# EAGLE board Module_MCU_ESP32Embed (EAGLE 9.6.2)
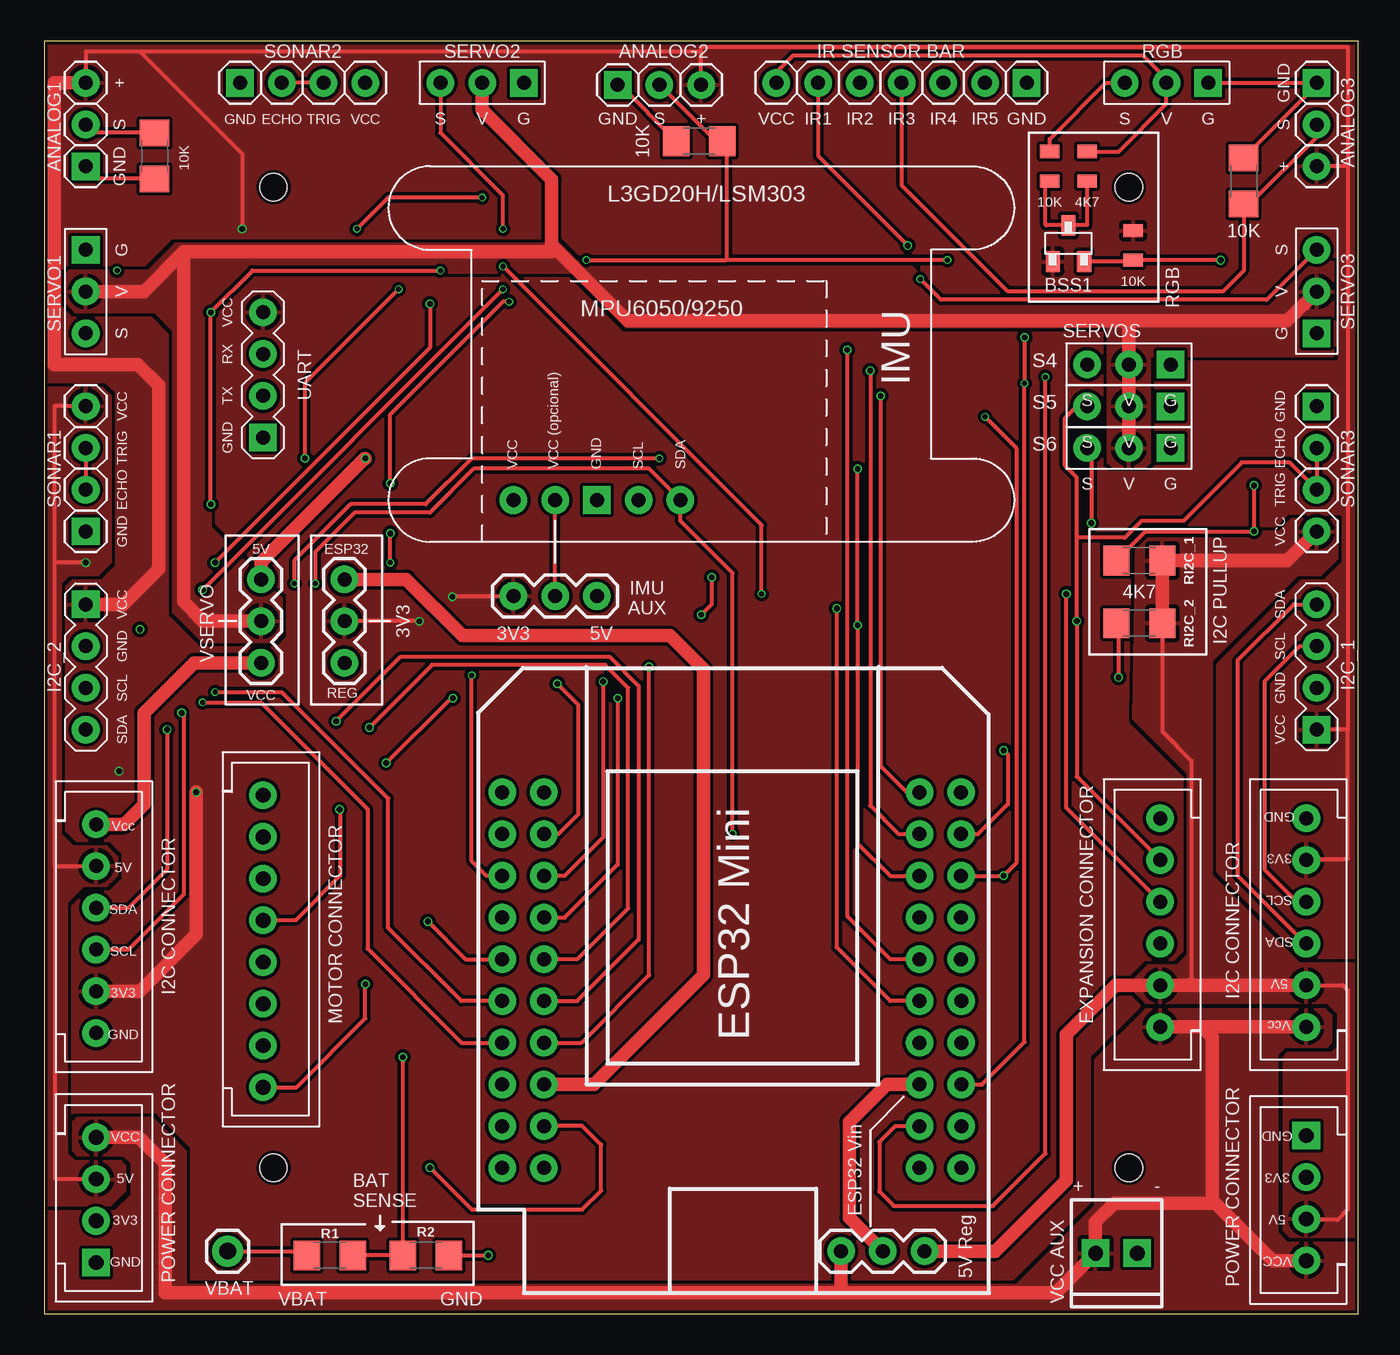
[diagram p0: board, top side]
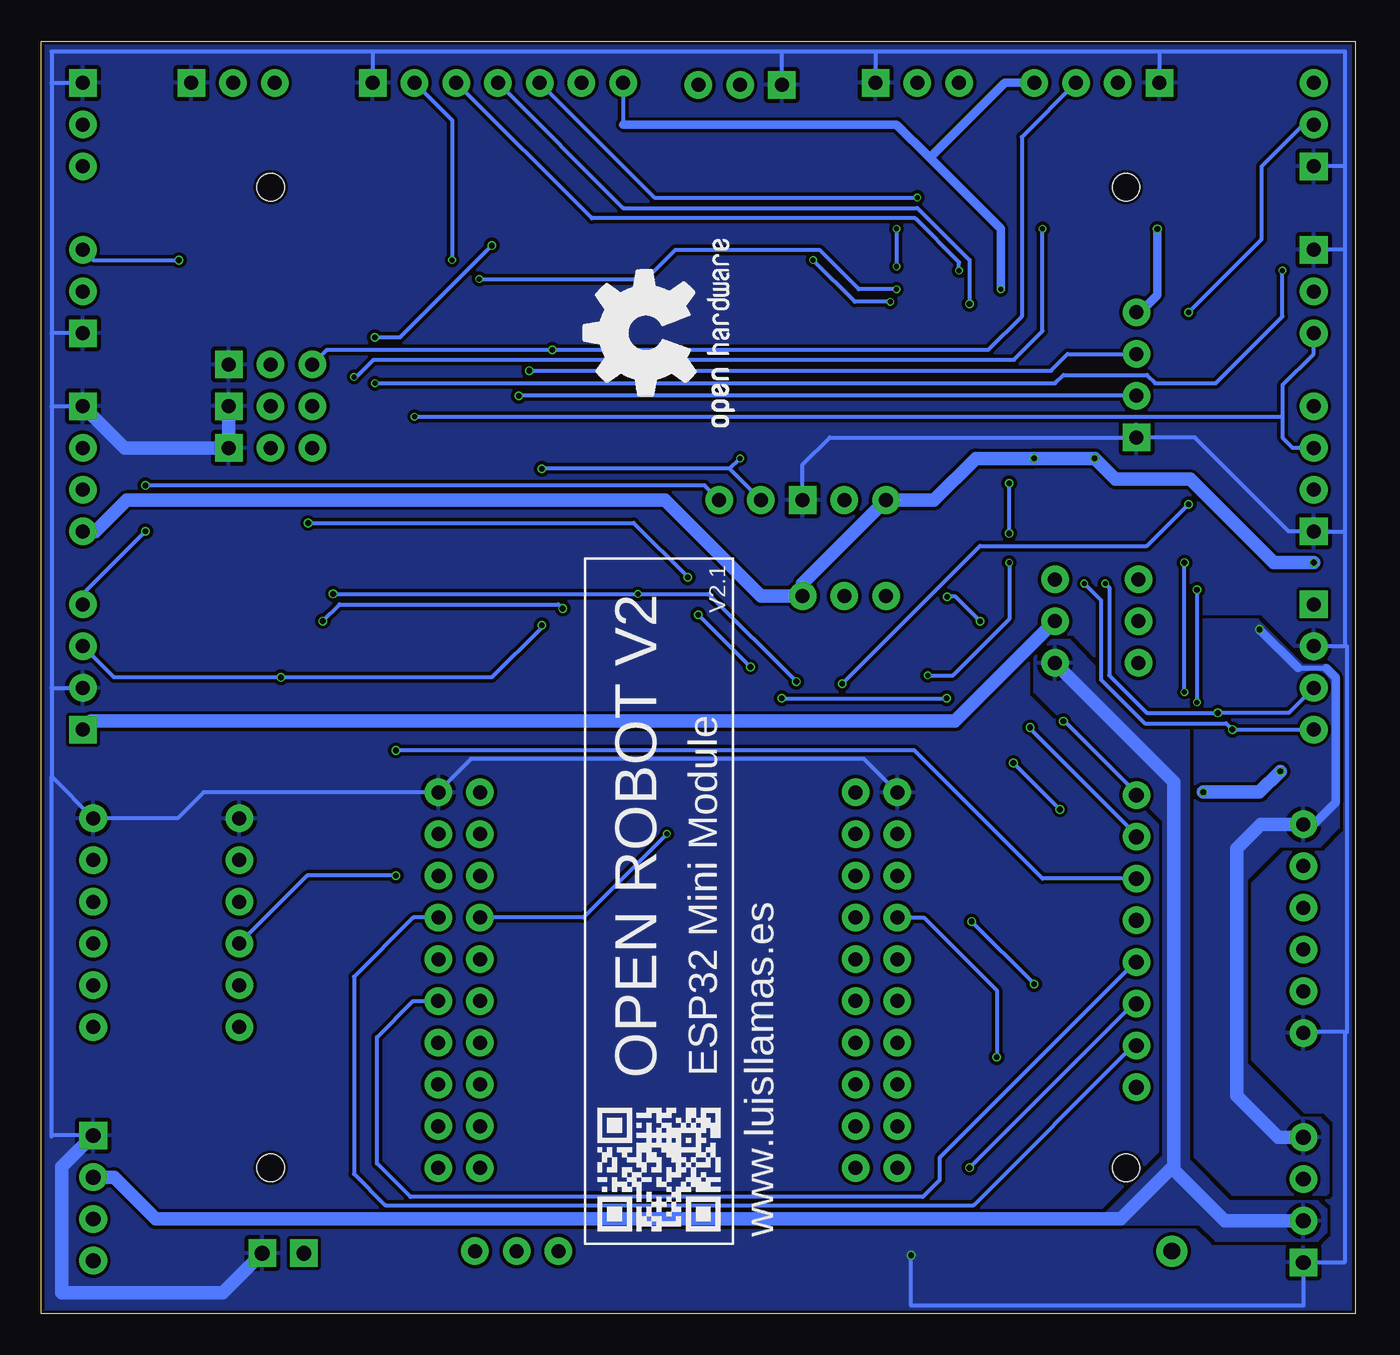
[diagram p1: board, bottom side, seen from below]

Size 80.01 x 77.47 mm. Coordinates in mm from the lower left corner, seen from the top.
Outline: 0,77.47 0,0 80.01,0 80.01,77.47 0,77.47
Copper layers (1*16): Top 0.035559375mm / dielectric 1.6mm / Bottom 0.035559375mm
Design rules "jlcpcb2layer": minimum track width 5mil, minimum drill 12mil, track to track 5mil, track to pad 5mil, pad to pad 5mil, via to via 5mil, smd to smd 5mil, copper to edge 8mil, drill to drill 6mil, minimum pad ring 5mil, minimum via ring 3mil, stop-mask expansion 2.5mil, vias tented up to drill 0mil, thermal gap 10mil
Net classes: 0 default: clearance 0.205 mm
Holes 1.65 mm at 13.97,68.58 13.97,8.89 66.04,68.58 66.04,8.89

## Footprints (pad centres in the part's own frame; a part is rotated, then mirrored left to right if it is on the bottom)
JUMPER_3 = drill 0.85 pad 1.676: 1 0,0; 2 2.54,0; 3 5.08,0
0805 = smd 0.8 x 1.2: 1 -0.9,0; 2 0.9,0
LDR = drill 0.85 pad 1.676 square: GND 0,0 | drill 0.85 pad 1.676: SIG 2.54,0; VCC 5.08,0
1X02_2.54_SCREWTERM = drill 0.9 pad 1.676 square: P1 2.54,0; P2 0,0
1X01 = drill 1.016 pad 1.88: 1 0,0
SOT23 = smd 1.3 x 0.9: 1 -1.1,0.95; 2 -1.1,-0.95; 3 1.1,0
CONNECTOR_AUX = drill 0.85 pad 1.676: 5V 0,-3.754; GND 0,6.406; GPIO1 0,-1.214; GPIO2 0,1.326; GPIO3 0,3.866; VC 0,-6.294
CONNECTOR_I2C = drill 0.85 pad 1.676: 3V3 0,3.866; 5V 0,-3.754; GND 0,6.406; SCL 0,1.326; SDA 0,-1.214; VC 0,-6.294
I2C_VCC_GND_SCL_SDA = drill 0.85 pad 1.676: GND 2.54,0; SCL 5.08,0; SDA 7.62,0 | drill 0.85 pad 1.676 square: VCC 0,0
IR-5 = drill 0.85 pad 1.676: 1 -5.08,0; 2 -2.54,0; 3 0,0; 4 2.54,0; 5 5.08,0; VCC -7.62,0 | drill 0.85 pad 1.676 square: GND 7.62,0
SERVO = drill 0.85 pad 1.676 square: GND -2.54,0 | drill 0.85 pad 1.676: SIG 2.54,0; VCC 0,0
MOTOR-CONNECTOR = drill 0.9 pad 1.676: EN_A1/S1_S 0,-8.834; EN_A2/S1_D 0,-6.294; EN_B1/S2_D 0,-1.214; EN_B2/S3_S 0,1.326; ENC_1/S4_S 0,6.406; ENC_2/S4_D 0,8.946; PWM_A/S2_S 0,-3.754; PWM_B/S3_D 0,3.866
POWER-CONNECTOR = drill 0.9 pad 1.676: 3V3 0,1.326; 5V 0,-1.214; VCC 0,-3.754 | drill 0.9 pad 1.676 square: GND 0,3.866
1206 = smd 1.6 x 1.8: 1 -1.4,0; 2 1.4,0
ULTRASONIC = drill 0.85 pad 1.676: ECHO 1.27,0; TRIG -1.27,0; VCC -3.81,0 | drill 0.85 pad 1.676 square: GND 3.81,0
IMU_6/9/10DOF = drill 0.85 pad 1.676 square: GND -8.89,6.35 | drill 0.85 pad 1.676: SCL -8.89,3.81; SDA -8.89,1.27; VCC -8.89,11.43; VCC_AUX -8.89,8.89
ESP32-WEMOS = drill 0.85 pad 1.676: 3V3 -15.294,11.42; CLK/IO6 10.111,6.34; CMD/IO11 -17.834,6.34; GND@1 -17.834,29.2; GND@2 7.571,13.96; GND@3 10.106,29.2; IO0 10.111,13.96; IO2 10.111,11.42; IO4 10.111,16.5; IO5 -15.294,13.96; IO16 7.571,16.5; IO17 7.571,19.04; IO18 -15.294,21.58; IO19 -15.294,19.04; IO21 7.571,21.58; IO22 7.571,24.12; IO23 -15.294,16.5; IO25 10.106,24.12; IO26 -15.294,24.12; IO27 10.106,26.66; IO32 10.106,21.58; IO33 -17.834,19.04; IO34 -17.834,16.5; IO35 -17.834,21.58; NC@1 -17.834,26.66; NC@2 -17.834,11.42; RST/EN -15.294,29.2; RXD/IO3 7.571,26.66; SD0/IO7 7.571,6.34; SD1/IO8 10.111,8.88; SD2/IO9 -17.834,8.88; SD3/IO10 -15.294,6.34; SVN/IO39 -17.834,24.12; SVP/IO36 -15.294,26.66; TCK/IO13 -15.294,8.88; TD0/IO15 7.571,8.88; TDI/IO12 10.106,19.04; TMS/IO14 -17.834,13.96; TXD/IO1 7.571,29.2; VCC 7.571,11.42
GENERIC_UART = drill 0.85 pad 1.676 square: GND 0,0 | drill 0.85 pad 1.676: RX 5.08,0; TX 2.54,0; VCC 7.62,0

## Placement (x,y rotation side)
3V3_SELECTOR  JUMPER_3  [JUMPER_3]  18.29,44.7 270 top
4K1  470  [0805]  61.21,69.85 270 top
10K1  10K  [0805]  66.29,65.02 90 top
ANALOG1  [LDR]  2.54,69.85 90 top
ANALOG2  [LDR]  34.92,74.8 0 top
ANALOG3  [LDR]  77.47,74.93 270 top
AUX_POWER  [1X02_2.54_SCREWTERM]  66.55,3.68 180 top
BAT_SENSE  [1X01]  11.18,3.81 0 top
BSS1  [SOT23]  62.36,65.15 90 top
CON_AUX  CONNECTOR_AUX  [CONNECTOR_AUX]  67.94,23.75 0 top
CON_I2C_1  CONNECTOR_I2C  [CONNECTOR_I2C]  76.83,23.75 0 top
CON_I2C_2  CONNECTOR_I2C  [CONNECTOR_I2C]  3.17,23.5 180 top
GOLD_ORB_SM1  OSHWLOGO_GOLD_ORB_MED  [OSHW1]  36.07,53.34 90 bottom
I2C_1  I2C  [I2C_VCC_GND_SCL_SDA]  77.47,35.56 90 top
I2C_2  GENERIC_I2CVCC_GND_SCL_SDA  [I2C_VCC_GND_SCL_SDA]  2.54,43.18 270 top
IMU_AUX  JUMPER_3  [JUMPER_3]  28.57,43.69 0 top
IR_SENSOR  [IR-5]  52.2,74.93 0 top
JP1  [SERVO]  68.33,74.93 180 top
MOTOR_CONNECTOR  MOTOR-CONNECTOR  [MOTOR-CONNECTOR]  13.34,22.73 180 top
POWER_CONNECTOR_1  POWER-CONNECTOR  [POWER-CONNECTOR]  3.17,6.99 180 top
POWER_CONNECTOR_2  POWER-CONNECTOR  [POWER-CONNECTOR]  76.83,6.99 0 top
R1  [1206]  17.4,3.56 180 top
R2  [1206]  23.24,3.56 0 top
R3  10K  [0805]  63.5,69.85 90 top
R_LDR_1  10k  [1206]  6.73,70.48 90 top
R_LDR_2  10k  [1206]  39.88,71.37 0 top
R_LDR_3  10k  [1206]  73.03,68.96 270 top
RI2C_1  4k7  [1206]  66.67,45.85 0 top
RI2C_2  4k7  [1206]  66.67,42.04 0 top
S4  [SERVO]  66.04,57.78 180 top
S5  [SERVO]  66.04,55.24 180 top
S6  [SERVO]  66.04,52.7 180 top
SERVO1  [SERVO]  2.54,62.23 270 top
SERVO2  [SERVO]  26.67,74.93 180 top
SERVO3  [SERVO]  77.47,62.23 90 top
SONAR1  [ULTRASONIC]  2.54,51.44 270 top
SONAR2  [ULTRASONIC]  15.75,74.93 180 top
SONAR3  [ULTRASONIC]  77.47,51.44 90 top
U1  IMU_6/9/10DOFMPU6050  [IMU_6/9/10DOF]  40.01,58.42 90 top
U$5  ESP32-WEMOS  [ESP32-WEMOS]  45.72,2.54 0 top
UART  UART  [GENERIC_UART]  13.34,53.34 90 top
VIN_SELECTOR  JUMPER_3  [JUMPER_3]  53.59,3.81 180 top
VSERVO_SELECTOR  JUMPER_3  [JUMPER_3]  13.21,44.7 270 top

## Library data of the parts
3V3_SELECTOR IMU_AUX VIN_SELECTOR VSERVO_SELECTOR = LLL_Jumpers
4K1 10K1 R1-R3 R_LDR_1-R_LDR_3 RI2C_1 RI2C_2 = SparkFun-Resistors
ANALOG1-ANALOG3 I2C_1 I2C_2 IR_SENSOR JP1 S4-S6 SERVO1-SERVO3 SONAR1-SONAR3 UART = LLL_Headers
AUX_POWER CON_AUX CON_I2C_1 CON_I2C_2 = LLL_Connectors
BAT_SENSE = SparkFun-Connectors
BSS1 = we-transistor
GOLD_ORB_SM1 = LLL_Frames
MOTOR_CONNECTOR = LLL_Motors
POWER_CONNECTOR_1 POWER_CONNECTOR_2 = LLL_Power
U1 = LLL_IMUs
U$5 = LLL_ESP32

## Nets
3V3: 3V3_SELECTOR.2 10K1.2 ANALOG1.VCC ANALOG2.VCC ANALOG3.VCC BSS1.1 CON_I2C_1.3V3 CON_I2C_2.3V3 I2C_1.VCC I2C_2.VCC IMU_AUX.1 UART.VCC
3V3_ARD: 3V3_SELECTOR.1 U$5.3V3
3V3_REG: 3V3_SELECTOR.3 POWER_CONNECTOR_1.3V3 POWER_CONNECTOR_2.3V3
5V_REG: CON_AUX.5V CON_I2C_1.5V CON_I2C_2.5V IMU_AUX.3 IR_SENSOR.VCC JP1.VCC POWER_CONNECTOR_1.5V POWER_CONNECTOR_2.5V R3.2 RI2C_1.2 RI2C_2.2 SONAR1.VCC SONAR2.VCC SONAR3.VCC U1.VCC VIN_SELECTOR.1 VSERVO_SELECTOR.1
BAT_RAW: BAT_SENSE.1 R1.2
BAT_SENSE: R1.1 R2.1 U$5.IO35
ENCODER1: MOTOR_CONNECTOR.ENC_1/S4_S U$5.IO32
ENCODER2: MOTOR_CONNECTOR.ENC_2/S4_D U$5.IO33
GND: ANALOG1.GND ANALOG2.GND ANALOG3.GND AUX_POWER.P2 CON_AUX.GND CON_I2C_1.GND CON_I2C_2.GND I2C_1.GND I2C_2.GND IR_SENSOR.GND JP1.GND POWER_CONNECTOR_1.GND POWER_CONNECTOR_2.GND R2.2 R_LDR_1.1 R_LDR_2.1 R_LDR_3.1 S4.GND S5.GND S6.GND SERVO1.GND SERVO2.GND SERVO3.GND SONAR1.GND SONAR2.GND SONAR3.GND U1.GND U$5.GND@1 U$5.GND@3 UART.GND
I2C_3V3_SCL: CON_I2C_1.SCL CON_I2C_2.SCL I2C_1.SCL I2C_2.SCL RI2C_2.1 U1.SCL U$5.IO22
I2C_3V3_SDA: CON_I2C_1.SDA CON_I2C_2.SDA I2C_1.SDA I2C_2.SDA RI2C_1.1 U1.SDA U$5.IO21
IR1: IR_SENSOR.1 U$5.IO2
IR2: IR_SENSOR.2 U$5.TD0/IO15
IR3/ANALOG3: ANALOG3.SIG IR_SENSOR.3 R_LDR_3.2 U$5.IO34
IR4/ANALOG1: ANALOG1.SIG IR_SENSOR.4 R_LDR_1.2 U$5.SVP/IO36
IR5/ANALOG2: ANALOG2.SIG IR_SENSOR.5 R_LDR_2.2 U$5.SVN/IO39
MOTOR_A1: MOTOR_CONNECTOR.EN_A1/S1_S U$5.IO23
MOTOR_A2: MOTOR_CONNECTOR.EN_A2/S1_D U$5.IO19
MOTOR_B1: MOTOR_CONNECTOR.EN_B1/S2_D U$5.IO18
MOTOR_B2: MOTOR_CONNECTOR.EN_B2/S3_S U$5.IO4
MOTOR_PWM_A: MOTOR_CONNECTOR.PWM_A/S2_S U$5.IO27
MOTOR_PWM_B: MOTOR_CONNECTOR.PWM_B/S3_D U$5.TCK/IO13
N$2: 4K1.2 BSS1.3 R3.1
N$32: U$5.GND@2
RGB: 4K1.1 JP1.SIG
SERVO1/SONAR1/AUX1: CON_AUX.GPIO1 SERVO1.SIG SONAR1.ECHO SONAR1.TRIG U$5.IO25
SERVO2/AUX2: CON_AUX.GPIO2 SERVO2.SIG U$5.IO26
SERVO3: 10K1.1 BSS1.2 SERVO3.SIG U$5.TMS/IO14
SERVO4/SONAR2: S4.SIG SONAR2.ECHO SONAR2.TRIG U$5.IO17
SERVO5/SONAR3/AUX3: CON_AUX.GPIO3 S5.SIG SONAR3.ECHO SONAR3.TRIG U$5.IO16
SERVO6: S6.SIG U$5.IO5
UART_3V3_RX: U$5.RXD/IO3 UART.RX
UART_3V3_TX: U$5.TXD/IO1 UART.TX
VCC: AUX_POWER.P1 CON_AUX.VC CON_I2C_1.VC CON_I2C_2.VC POWER_CONNECTOR_1.VCC POWER_CONNECTOR_2.VCC VIN_SELECTOR.3 VSERVO_SELECTOR.3
VCC_IMU_AUX: IMU_AUX.2 U1.VCC_AUX
VIN_ARD: U$5.VCC VIN_SELECTOR.2
VSERVO: S4.VCC S5.VCC S6.VCC SERVO1.VCC SERVO2.VCC SERVO3.VCC VSERVO_SELECTOR.2

## Tracks (layer width: path | path; a pad name or v marks a point on that pad's centre or on a via)
3V3  (via drill 0.35)
  Top 0.254: ANALOG2.VCC 40.01,76.83 | 40.01,76.83 40.01,77.09 79.38,77.09 79.38,69.85 | 79.38,69.85 ANALOG3.VCC | 40.01,76.83 5.84,76.83 | 5.84,76.83 2.54,76.83 ANALOG1.VCC | 5.84,76.83 12.06,70.61 v12.06,66.04 | 79.38,69.85 79.38,35.56 | 79.38,35.56 I2C_1.VCC | 79.38,35.56 79.38,27.69 76.91,27.69 CON_I2C_1.3V3 | v22.85,42.16 3V3_SELECTOR.2 | v24.85,43.65 24.89,43.69 IMU_AUX.1
  Top 0.813: I2C_2.VCC 4.83,43.18 6.99,45.34 6.99,56.52 5.71,57.78 0.64,57.78 0.64,74.93 ANALOG1.VCC | CON_I2C_2.3V3 5.81,19.63 9.27,23.09 v9.27,31.75
  Bottom 0.254: v22.85,42.16 24.34,43.65 v24.85,43.65
  Bottom 0.508: UART.VCC 13.11,60.96 12.06,62 v12.06,66.04
  Bottom 0.813: 3V3_SELECTOR.2 24.38,36.07 76.96,36.07 I2C_1.VCC | v9.27,31.75 5.84,31.75 v4.57,33.02
  pour Top (rank 2): 0,0 0,77.47 80.01,77.47 80.01,0
3V3_ARD
  Top 0.813: U$5.3V3 33.47,13.96 40.13,20.62 40.13,39.24 38.1,41.27 25.48,41.27 22.05,44.7 3V3_SELECTOR.1
3V3_REG
  Bottom 0.813: 3V3_SELECTOR.3 11.05,32.38 11.05,9.02 11.18,8.89 | 11.18,8.89 14.29,5.78 73.03,5.78 75.56,8.31 POWER_CONNECTOR_2.3V3 | POWER_CONNECTOR_1.3V3 7.95,5.66 11.18,8.89
  pour Bottom: 9.53,5.46 15.49,5.46 15.49,5.84 11.68,9.65 11.68,29.97 19.56,37.85 19.56,40.26 18.8,41.02 17.4,41.02 12.19,35.56 10.16,35.56 10.16,9.4 7.62,6.86 2.29,6.86 1.78,6.35 1.78,4.95 2.29,4.45 8.51,4.45
5V_REG  (via drill 0.3, 0.35)
  Top 0.152: JP1.VCC 68.33,75.18
  Top 0.254: RI2C_2.2 68.08,35.43 69.85,33.66 69.85,20.07 69.85,20 | CON_I2C_1.5V 79.06,20 79.38,19.68 79.38,6.35 78.74,5.71 76.89,5.71 POWER_CONNECTOR_2.5V | SONAR1.VCC 0.64,55.24 0.64,45.72 | 0.64,45.72 0.64,27.3 0.69,27.25 | 0.69,27.25 CON_I2C_2.5V | POWER_CONNECTOR_1.5V 0.69,8.2 0.69,27.25 | v2.54,45.72 0.64,45.72 | v21.59,62.36 15.88,56.64 v15.88,52.07 | 68.33,75.18 66.93,76.58 45.59,76.58 44.58,75.56 IR_SENSOR.VCC | R3.2 65.42,70.75 68.33,73.66 JP1.VCC
  Top 0.813: RI2C_2.2 RI2C_1.2 75.69,45.85 SONAR3.VCC | 69.85,20 CON_I2C_1.5V | v19.56,52.07 19.51,52.07 13.21,45.77 VSERVO_SELECTOR.1 | 69.85,20.07 69.78,20 CON_AUX.5V 65.21,20 62.23,17.02 62.23,8.13 57.91,3.81 VIN_SELECTOR.1
  Bottom 0.254: IR_SENSOR.VCC 44.58,72.39
  Bottom 0.508: SONAR2.VCC 21.34,74.93 25.91,70.36 | 44.58,72.39 27.94,72.39 25.91,70.36 | 25.91,70.36 21.59,66.04 v21.59,62.36
  Bottom 0.813: v2.54,45.72 4.98,45.72 10.06,50.8 14.61,50.8 v15.88,52.07 v19.56,52.07 23.11,52.07 25.65,49.53 U1.VCC 33.66,44.45 IMU_AUX.3 36.2,43.69 42.04,49.53 74.8,49.53 76.71,47.62 SONAR3.VCC
  pour Top: 78.74,45.97 78.74,48.35 75.95,48.39 75.18,47.62 66.89,47.62 66.45,47.19 66.29,36.2 69.6,32.89 69.6,21.84 68.96,21.21 67.18,21.21 66.29,20.32 66.29,19.68 67.06,18.92 78.11,18.92 78.74,18.29 78.74,16.26 78.36,15.88 75.69,15.88 75.44,15.62 75.44,5.08 75.82,4.7 80.01,4.7 80.01,21.34 76.45,21.34 71.12,26.67 71.12,39.75 76.33,44.96 77.72,44.96
  pour Top: 0,56.39 3.56,56.39 4.06,55.88 4.06,45.72 3.3,44.96 1.52,44.96 1.02,44.45 1.02,29.21 1.78,28.45 3.81,28.45 4.45,27.81 4.45,26.67 3.81,26.04 2.41,26.04 1.4,25.02 1.4,9.78 1.91,9.27 4.7,9.27 4.95,9.02 4.95,7.49 4.06,6.6 0,6.6
BAT_RAW
  Top 0.254: BAT_SENSE.1 15.74,3.81 R1.2
BAT_SENSE  (via drill 0.35)
  Top 0.254: v21.84,15.62 R2.1 R1.1
  Bottom 0.254: U$5.IO35 26.28,24.12 21.84,19.68 v21.84,15.62
ENCODER1
  Bottom 0.254: U$5.IO32 57.35,24.12 60.96,20.51 60.96,8.51 59.05,6.6 23.24,6.6 13.52,16.33 MOTOR_CONNECTOR.ENC_1/S4_S
ENCODER2  (via drill 0.35)
  Top 0.254: MOTOR_CONNECTOR.ENC_2/S4_D 15.37,13.79 19.56,17.98 v19.56,20.07 | v23.37,23.88 25.66,21.58 U$5.IO33
  Bottom 0.254: v19.56,20.07 v23.37,23.88
GND  (via drill 0.35)
  Top 0.254: R_LDR_2.1 35.05,74.8 ANALOG2.GND | R_LDR_3.1 77.47,74.81 ANALOG3.GND JP1.GND | R_LDR_1.1 3.31,69.08 ANALOG1.GND | R2.2 v27.05,3.56
  Bottom 0.254: ANALOG2.GND 34.92,76.83 | 34.92,76.83 59.82,76.83 | 59.82,76.83 IR_SENSOR.GND | 59.82,76.83 79.38,76.83 79.38,74.93 | SERVO3.GND 79.38,59.69 | 79.38,74.93 79.38,59.69 | 79.38,74.93 ANALOG3.GND | 79.38,59.69 79.38,55.24 | 79.38,55.24 SONAR3.GND | 79.38,55.24 79.38,38.1 | 79.38,38.1 I2C_1.GND | 79.38,38.1 79.38,32.7 | 79.38,32.7 CON_I2C_1.GND 71.7,30.16 70.11,31.74 55.88,31.74 | I2C_2.GND 0.64,40.64 | 0.64,40.64 0.51,40.64 0.51,17.14 0.64,17.14 | 0.64,40.64 0.64,47.62 | 0.64,47.62 SONAR1.GND 4.06,47.62 9.78,53.34 UART.GND 32,53.34 33.66,51.69 U1.GND | 0.64,47.62 0.64,64.77 | 0.64,64.77 SERVO1.GND | 0.64,64.77 0.64,69.85 | 0.64,69.85 ANALOG1.GND | 0.64,69.85 0.64,76.83 11.94,76.83 | 11.94,76.83 SONAR2.GND | 11.94,76.83 29.21,76.83 | 29.21,76.83 SERVO2.GND | 29.21,76.83 34.92,76.83 | 0.64,17.14 0.64,3.17 0.69,3.12 POWER_CONNECTOR_1.GND 3.17,0.51 27.05,0.51 v27.05,3.56 | 0.64,17.14 3.12,17.14 CON_I2C_2.GND | POWER_CONNECTOR_2.GND 79.32,10.85 79.38,10.79 79.38,32.7 | U$5.GND@3 55.88,31.74 | U$5.GND@1 29.93,33.78 53.84,33.78 55.88,31.74
  Bottom 0.813: AUX_POWER.P2 68.96,1.27 78.74,1.27 78.74,8.95 POWER_CONNECTOR_2.GND | S5.GND S6.GND 74.93,52.7 SONAR3.GND
  pour Bottom (rank 2): 0,0 0,77.47 80.01,77.47 80.01,0
I2C_3V3_SCL  (via drill 0.3, 0.35)
  Top 0.254: CON_I2C_2.SCL 5.15,22.17 8.51,25.53 8.51,36.45 v8.38,36.58 | I2C_1.SCL 76.45,40.64 74.3,38.48 74.3,27.05 76.27,25.07 CON_I2C_1.SCL | RI2C_2.1 65.41,41.91 v65.41,38.73 | v15.24,44.45 15.24,45.85 18.67,49.28 23.24,49.28 26.04,52.07 v37.47,52.07 | v49.53,51.44 v49.53,41.91 49.53,28.64 51.51,26.66 U$5.IO22
  Bottom 0.254: I2C_2.SCL 4.06,36.58 v8.38,36.58 12.7,36.58 14.99,38.86 14.99,44.2 v15.24,44.45 | I2C_1.SCL 75.56,38.73 v65.41,38.73 52.58,38.73 49.53,41.78 v49.53,41.91 | 38.1,51.44 U1.SCL | 38.1,51.44 v37.47,52.07 | 38.1,51.44 v49.53,51.44
I2C_3V3_SDA  (via drill 0.3, 0.35)
  Top 0.254: CON_I2C_2.SDA 5.15,24.71 7.49,27.05 v7.49,35.56 | I2C_1.SDA 76.07,43.18 72.64,39.75 72.64,26.67 76.78,22.54 CON_I2C_1.SDA | RI2C_1.1 67.05,47.62 v73.66,47.62 v73.66,50.42 | v41.91,29.21 41.91,45.09 38.73,48.26 U1.SDA 36.83,51.44 26.16,51.44 23.5,48.77 18.92,48.77 16.51,46.35 v16.51,44.45
  Bottom 0.254: I2C_2.SDA v7.49,35.56 7.87,35.94 12.83,35.94 15.49,38.61 15.49,43.43 v16.51,44.45 | v73.66,47.62 77.47,43.81 I2C_1.SDA | v73.66,50.42 39.62,50.42 U1.SDA | U$5.IO21 47,24.12 v41.91,29.21
IR1  (via drill 0.3, 0.35)
  Top 0.254: U$5.IO2 57.1,13.96 59.69,16.55 v59.69,56.64 v59.69,59.44 | IR_SENSOR.1 47.12,70.48 v52.58,65.02
  Bottom 0.254: v4.45,63.5 4.45,60.71 8.51,56.64 12.19,56.64 12.7,57.15 17.78,57.15 18.29,56.64 v59.69,56.64 | v59.69,59.44 58.17,59.44 v52.58,65.02
IR2  (via drill 0.3)
  Top 0.254: U$5.TD0/IO15 51.81,11.42 50.85,10.46 50.85,7.44 51.73,6.57 57.77,6.57 60.96,9.76 v60.96,57.02 | v26.67,67.94 20.95,67.94 v19.05,66.04
  Bottom 0.254: IR_SENSOR.2 42.67,67.94 v26.67,67.94 | v19.05,66.04 19.05,59.82 20.79,58.08 59.78,58.08 60.83,57.02 v60.96,57.02
IR3/ANALOG3  (via drill 0.3, 0.35)
  Top 0.254: ANALOG3.SIG 77.47,71.63 73.4,67.56 R_LDR_3.2 73.03,63.5 71.75,62.23 58.68,62.23 52.2,68.71 IR_SENSOR.3 | U$5.IO34 25.41,19.04 20.95,23.5 20.95,31.37 14.48,37.85 v10.41,37.85 | v23.5,61.47 23.5,58.8 v10.41,45.72
  Bottom 0.254: IR_SENSOR.3 44.58,67.31 26.67,67.31 23.5,64.14 v23.5,61.47 | v10.41,37.85 v10.41,45.72
IR4/ANALOG1  (via drill 0.3, 0.35)
  Top 0.254: U$5.SVP/IO36 31.32,29.2 32.51,30.4 32.51,37.08 v31.24,38.35 | ANALOG1.SIG 3.04,71.89 R_LDR_1.2 | v10.16,49.28 v10.16,60.96 12.7,63.5 v24.13,63.5
  Bottom 0.254: v10.16,49.28 12.7,46.74 22.86,46.74 v31.24,38.35 | IR_SENSOR.4 46.48,66.67 26.8,66.67 24.13,64.01 v24.13,63.5 | v10.16,60.96 5.71,65.41 5.71,69.85 3.17,72.39 ANALOG1.SIG
IR5/ANALOG2  (via drill 0.3, 0.35)
  Top 0.254: U$5.SVN/IO39 26.93,26.66 26.04,27.56 v26.04,38.86 | 41.53,64.14 41.53,71.12 R_LDR_2.2 40.89,71.37 ANALOG2.SIG | v54.99,64.14 41.53,64.14 | v28.32,61.59 27.94,61.59 21.08,54.74 v21.08,50.55 | v33.02,64.14 41.53,64.14 | v21.08,45.72 v21.08,47.5
  Bottom 0.254: IR_SENSOR.5 54.99,72.64 v54.99,64.14 | v26.04,38.86 24.51,38.86 21.08,42.29 v21.08,45.72 | v28.32,61.59 30.48,61.59 v33.02,64.14 | v21.08,47.5 v21.08,50.55
MOTOR_A1  (via drill 0.35)
  Top 0.254: U$5.IO23 32.46,19.04 36.2,22.78 36.2,38.23 34.42,40.01 21.72,40.01 v17.78,36.07
  Bottom 0.254: MOTOR_CONNECTOR.EN_A1/S1_S 13.34,31.69 17.71,36.07 v17.78,36.07
MOTOR_A2  (via drill 0.35)
  Top 0.254: U$5.IO19 32.46,21.58 35.56,24.68 35.56,38.1 34.16,39.5 23.62,39.5 v19.81,35.69
  Bottom 0.254: v19.81,35.69 19.81,35.63 13.34,29.15 MOTOR_CONNECTOR.EN_A2/S1_D
MOTOR_B1  (via drill 0.35)
  Top 0.254: U$5.IO18 31.7,24.12 34.92,27.35 v34.92,37.47 | MOTOR_CONNECTOR.EN_B1/S2_D 15.31,23.95 18.03,26.67 18.03,30.66 v18,30.7 | v20.83,33.53 24.77,37.47 v24.89,37.47
  Bottom 0.254: v34.92,37.47 v24.89,37.47 | v20.83,33.53 v18,30.7
MOTOR_B2
  Bottom 0.254: U$5.IO4 57.35,19.04 59.56,16.83 59.56,9.14 57.53,7.11 26.34,7.11 25.31,8.14 25.31,9.48 13.39,21.41 MOTOR_CONNECTOR.EN_B2/S3_S
MOTOR_PWM_A  (via drill 0.35)
  Top 0.254: U$5.IO27 56.84,29.2 58.67,31.03 58.67,34.04 v58.42,34.29
  Bottom 0.254: MOTOR_CONNECTOR.PWM_A/S2_S 19.05,26.49 26.85,34.29 v58.42,34.29
MOTOR_PWM_B  (via drill 0.35)
  Top 0.254: v23.5,8.89 26.04,6.35 32.77,6.35 33.91,7.49 33.91,10.29 32.77,11.43 U$5.TCK/IO13
  Bottom 0.254: v23.5,8.89 13.52,18.87 MOTOR_CONNECTOR.PWM_B/S3_D
N$2
  Top 0.254: R3.1 63.5,66.29 62.4,66.29 BSS1.3 61,66.25 60.96,66.29 60.96,68.7 4K1.2
RGB
  Top 0.254: 4K1.1 61.21,71.51 64.63,74.93 JP1.SIG
SERVO1/SONAR1/AUX1  (via drill 0.3, 0.35)
  Top 0.254: U$5.IO25 v58.41,26.66 v58.42,26.67 59.18,27.43 59.18,52.7 v57.28,54.61 | SONAR1.TRIG SONAR1.ECHO
  Bottom 0.254: v58.42,26.67 63.81,26.67 CON_AUX.GPIO1 | SERVO1.SIG 2.54,58.42 4.45,56.52 4.45,54.61 | SONAR1.TRIG 3.81,52.7 4.45,53.34 4.45,54.61 | v57.28,54.61 4.45,54.61
SERVO2/AUX2  (via drill 0.3, 0.35)
  Top 0.254: U$5.IO26 31.7,26.66 34.04,29 v34.04,38.48 | CON_AUX.GPIO2 62.23,30.79 v62.23,43.81 | SERVO2.SIG 24.13,71.88 27.94,68.07 v27.94,66.04 | v27.94,63.75 43.69,48.01 v43.69,43.81
  Bottom 0.254: v34.04,38.48 39.37,43.81 v43.69,43.81 v62.23,43.81 | v27.94,66.04 v27.94,63.75
SERVO3  (via drill 0.3, 0.35)
  Top 0.254: U$5.TMS/IO14 25.41,16.5 19.68,22.23 19.68,30.73 13.21,37.21 v9.65,37.21 | SERVO3.SIG 74.42,61.72 54.61,61.72 v53.34,62.99 | v27.94,62.36 v9.65,44.07 | v71.63,64.14 71.62,64.12 10K1.1 66.22,64.05 BSS1.2
  Bottom 0.254: v27.94,62.36 30.23,62.36 32.64,64.77 41.4,64.77 43.18,62.99 v53.34,62.99 | v9.65,44.07 v9.65,37.21 | SERVO3.SIG 76.83,64.14 v71.63,64.14
SERVO4/SONAR2  (via drill 0.35)
  Top 0.254: U$5.IO17 51.51,21.58 48.9,24.2 v48.9,58.67 | SONAR2.TRIG SONAR2.ECHO
  Bottom 0.254: S4.SIG 62.61,58.67 v48.9,58.67 22.35,58.67 20.32,60.71 20.32,71.63 SONAR2.TRIG
SERVO5/SONAR3/AUX3  (via drill 0.35)
  Top 0.254: U$5.IO16 51.51,19.04 48.26,22.29 v48.26,42.93 | CON_AUX.GPIO3 62.87,32.7 v62.87,42.16 62.87,47.24 | 62.87,47.24 62.87,50.9 62.15,51.62 62.15,54.53 62.87,55.24 S5.SIG | SONAR3.ECHO SONAR3.TRIG 75.82,51.82 72.9,51.82 69.34,48.26 66.8,48.26 65.79,47.24 62.87,47.24
  Bottom 0.254: v48.26,42.93 48.51,43.18 61.85,43.18 v62.87,42.16
SERVO6  (via drill 0.35)
  Top 0.254: U$5.IO5 32.71,16.5 36.83,20.62 v36.83,39.37 | S6.SIG 63.75,52.45 v63.75,48.13 | v40.64,44.83 40.64,43.18 v40.01,42.55
  Bottom 0.254: v63.75,48.13 43.94,48.13 v40.64,44.83 | v40.01,42.55 v36.83,39.37
UART_3V3_RX  (via drill 0.35)
  Top 0.254: U$5.RXD/IO3 52.02,29.2 50.29,30.93 v50.29,57.4
  Bottom 0.254: v50.29,57.4 18.54,57.4 17.53,58.42 UART.RX
UART_3V3_TX  (via drill 0.35)
  Top 0.254: U$5.TXD/IO1 52.53,31.74 50.93,33.34 v50.93,55.88
  Bottom 0.254: UART.TX v50.93,55.88
VCC  (via drill 0.35)
  Top 0.813: POWER_CONNECTOR_2.VCC 74.8,3.23 71.3,6.73 71.12,6.73 | 71.12,6.73 65.15,6.73 64.01,5.59 AUX_POWER.P1 61.59,1.27 48.51,1.27 | CON_I2C_1.VC 70.48,17.45 | 70.48,17.45 CON_AUX.VC | 70.48,17.45 71.12,16.82 71.12,6.73 | VSERVO_SELECTOR.3 9.14,39.62 6.1,36.58 6.1,30.99 4.9,29.79 CON_I2C_2.VC | POWER_CONNECTOR_1.VCC 5.77,10.74 7.37,9.14 7.37,1.27 48.51,1.27 | VIN_SELECTOR.3 48.51,1.27
  Bottom 0.305: 3.5,39.31 1.78,39.31
  Bottom 0.508: 1.78,39.31 1.2,38.73 1.2,31.12 2.54,29.79 CON_I2C_2.VC | v5.84,41.66 3.5,39.31
  Bottom 0.813: POWER_CONNECTOR_1.VCC 4.7,10.74 7.24,13.28 7.24,28.32 5.77,29.79 CON_I2C_2.VC
  pour Bottom: 1.02,38.61 1.91,39.5 3.17,39.5 5.94,42.26 9.78,42.26 9.78,9.53 7.49,7.24 1.78,7.24 1.65,7.37 1.65,11.43 2.16,11.94 3.3,11.94 6.6,15.24 6.6,26.42 4.57,28.45 2.16,28.45 1.02,29.59
  pour Top: 67.06,18.54 77.98,18.54 78.36,18.16 78.36,16.51 78.11,16.26 75.56,16.26 75.06,15.75 75.06,4.95 75.69,4.32 79.76,4.32 79.76,0.25 0.25,0.25 0.25,6.22 4.32,6.22 5.33,7.24 5.33,9.14 4.83,9.65 2.03,9.65 1.78,9.91 1.78,11.68 2.03,11.94 6.6,11.94 8.64,9.91 8.64,1.78 59.18,1.78 64.01,6.6 64.01,15.49
VCC_IMU_AUX
  Top 0.254: IMU_AUX.2 U1.VCC_AUX
VIN_ARD
  Top 0.813: U$5.VCC 51.3,13.96 49.02,11.68 49.02,5.84 VIN_SELECTOR.2
VSERVO
  Top 0.813: SERVO2.VCC 26.67,73.28 30.91,69.04 30.91,64.77 | 30.91,64.77 30.91,64.64 8.51,64.64 | SERVO1.VCC 6.1,62.23 8.51,64.64 | 30.91,64.77 31.2,64.77 35.52,60.45 66.04,60.45 | S6.VCC S5.VCC S4.VCC 66.04,60.45 | 8.51,64.64 8.51,43.34 9.67,42.18 13.19,42.18 VSERVO_SELECTOR.2 | SERVO3.VCC 75.69,60.45 66.04,60.45
  pour Top: 14.48,43.56 14.48,41.4 13.97,40.89 9.65,40.89 7.87,42.67 7.87,59.82 6.73,60.96 1.91,60.96 1.27,61.59 1.27,63.25 1.52,63.5 6.35,63.5 8,65.15 30.61,65.15 30.61,69.09 31.24,69.09 31.24,65.28 32.51,64.01 52.58,64.01 54.86,61.72 74.42,61.72 76.71,64.01 78.49,64.01 78.49,58.29 67.31,58.29 67.31,51.82 67.06,51.56 65.02,51.56 64.77,51.82 64.77,60.07 35.43,60.07 32.13,63.37 12.57,63.37 10.16,60.96 10.16,47.88

## Text on the board
tPlace: SONAR2 | SERVO2 | ANALOG2 | IR SENSOR BAR | RGB | ANALOG3 | ANALOG1 | 10K | 10K | 10K | 4K7 | 10K | 10K | SERVO1 | RGB | SERVO3 | SERVOS | UART | SONAR1 | SONAR3 | 5V | ESP32 | IMU / AUX | 4K7 | VSERVO | 3V3 | 3V3 | 5V | I2C PULLUP | I2C_2 | I2C_1 | VCC | REG | I2C CONNECTOR | I2C CONNECTOR | MOTOR CONNECTOR | EXPANSION CONNECTOR | BAT / SENSE | + | - | ESP32 Vin | POWER CONNECTOR | 5V Reg | POWER CONNECTOR | VBAT | VBAT | GND | VCC AUX
bPlace: V2.1 | ESP32 Mini Module | OPEN ROBOT V2 | www.luisllamas.es